# Altium PCB Pcb.PcbDoc
Units mm, origin at the board's own origin, x right, y up, seen from the top; angles counter-clockwise.
Board outline 17 x 18 mm, 2 copper layers (Top Layer, Bottom Layer); 3 components, 4 nets, 11 pads, 4 vias.
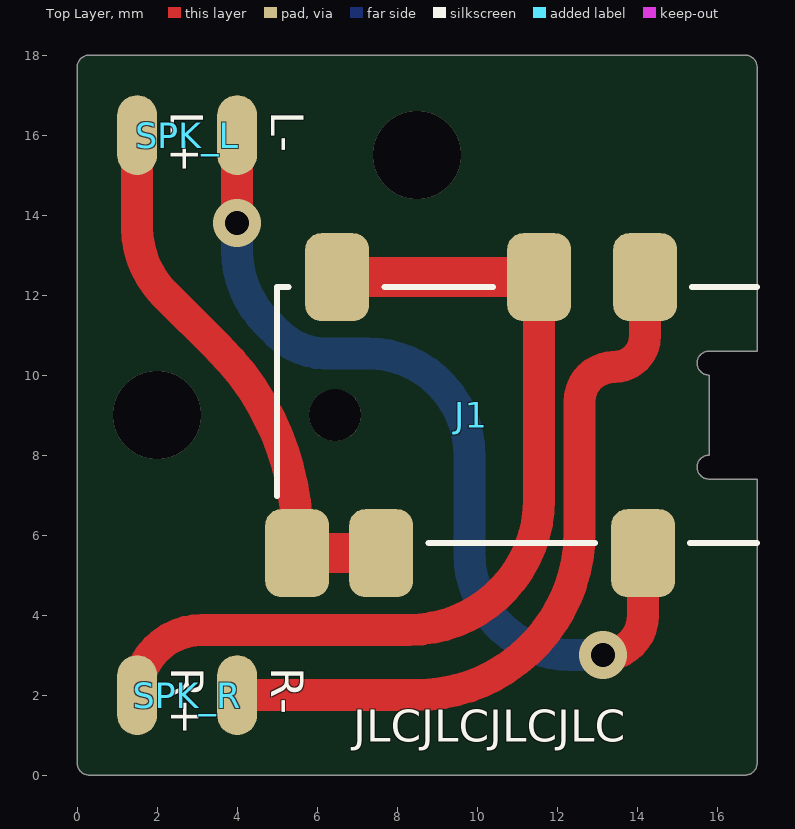
[diagram p0: Top Layer view]
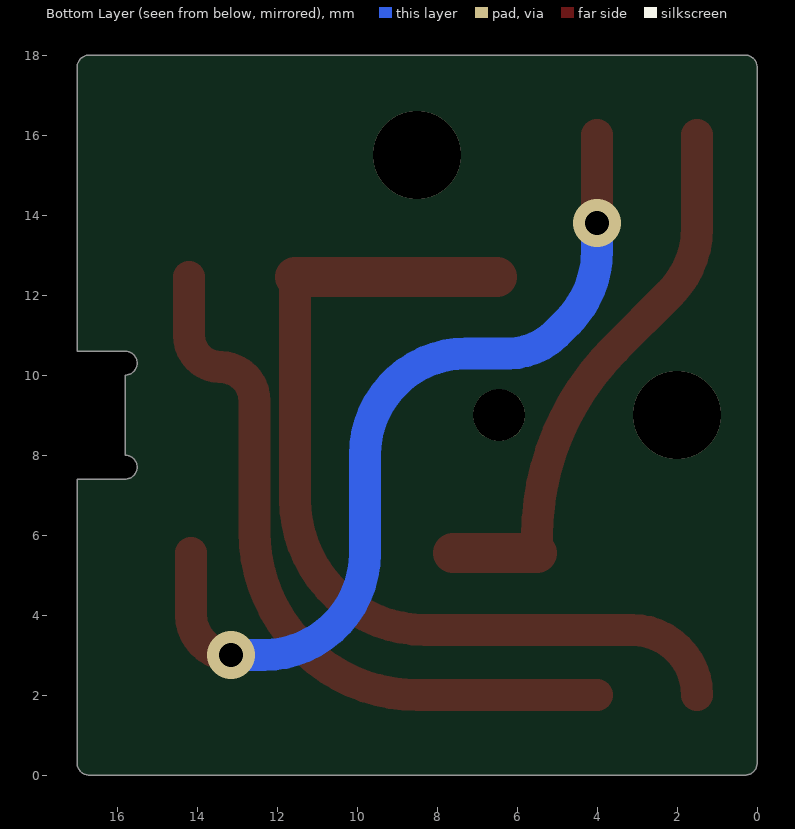
[diagram p1: Bottom Layer view, seen from below]

## Layer stack, top to bottom
Top Solder: solder mask 0.0102, Solder Resist, Dk 3.5
Top Layer: signal copper 0.0356
Dielectric 1: dielectric 0.32, FR-4, Dk 4.8
Bottom Layer: signal copper 0.0356
Bottom Solder: solder mask 0.0102, Solder Resist, Dk 3.5

## Board outline
0.301,0.001 cw(c0.301,0.301) 0.001,0.301 0,0.302 0,17.7 cw(c0.3,17.7) 0.3,18 16.7,18 cw(c16.7,17.7) 17,17.7 17,12.2 17,10.6 15.8,10.6 ccw(c15.8,10.3) 15.8,10 15.8,8 ccw(c15.8,7.7) 15.8,7.4 17,7.4 17,5.8 17,0.301 cw(c16.7,0.301) 16.7,0.001 16.699,0

## Design rules (kind name [scope] priority, off if disabled: settings)
Clearance [All] p1: gap=0.152 ignorepadtopadclearanceinfootprint=FALSE
PolygonConnect [All] p1: connectstyle=Relief reliefconductorwidth=0.254 reliefentries=4 polygonreliefangle="90 Angle" airgapwidth=0.254
RoutingVias [All] p1: holewidth=0.6 width=1.2 viastyle="Through Hole" minholewidth=0.3 minwidth=0.6 maxholewidth=6.35 maxwidth=6.35
SolderMaskExpansion [All] p1: expansion=0.102 istentingtop=FALSE
Width [All] p1: maxlimit=2 minlimit=0.254 preferedwidth=0.254
30 further rules are at their usual default settings.

## Components (designator, comment, footprint, x,y, rotation, side; value= is the part's Value field where it differs from the comment)
J1 "PJ-342" PJ-342 17,5.55 r180 top
SPK_L "Spaker" SPAKER 1.5,16 r0 top
SPK_R "Spaker" SPAKER 1.5,2 r0 top

## Footprints (in the part's own frame and the unit in brackets; to place one, negate y for a bottom-side part, rotate by r counter-clockwise, add the part's x,y. Pads: shape width x height; smd on the part's side, far side on the other; paste and mask are expansions set on the pad)
PJ-342 [mm]
  rrect50% 1.6x2.2 smd: 1(2.8,-6.9) 2(2.85,0) 3(5.45,-6.9) 4(9.4,0) 5(10.5,-6.9) 6(11.5,0)
  round 1.3 hole 1.3: ""(10.55,-3.45)
  silkscreen extent 0,-6.65 12,-0.25
SPAKER [mm]
  oval 1x2 smd: SPK_N(2.5,0) SPK_P(0,0)

## Via types
v1: diameter 1.2, hole 0.6, Top Layer to Bottom Layer, tented both sides, 2 vias
v2: diameter 2.2, hole 2.2, Top Layer to Bottom Layer, 2 vias

## Nets (pads, with @x,y where several pads share a name; then routed paths per layer and width w, separated by ;. In a path a pad name is that pad's centre, name@x,y a point inside that pad or via, vN(x,y) a via of type N, cw(c..) or ccw(c..) an arc to the next point about the centre after c; other vN are vias at no path point)
SPK_L+: J1.4 J1.6 SPK_L.SPK_P | length 13.8
  Top Layer w0.8: SPK_L.SPK_P 1.5,13.8 1.5,13.687 ccw(c3.847,13.687) 2.187,12.028 3.558,10.657 cw(c-1.132,5.968) 5.5,5.968 5.5,5.965 J1.6
  Top Layer w1: J1.6 J1.4
SPK_L-: J1.2 SPK_L.SPK_N | length 22
  Top Layer w0.8: v1(4,13.8) SPK_L.SPK_N ; v1(13.15,3) ccw(c13.15,4) 14.15,4 J1.2
  Bottom Layer w0.8: v1(4,13.8) 4,13.112 ccw(c6.54,13.112) 4.744,11.316 5.027,11.033 ccw(c6.205,12.211) 6.205,10.545 7.265,10.545 cw(c7.265,8.005) 9.805,8.005 9.805,5.54 ccw(c12.345,5.54) 12.345,3 v1(13.15,3)
SPK_R+: J1.3 J1.5 SPK_R.SPK_P | length 23.5
  Top Layer w0.8: SPK_R.SPK_P cw(c3.13,2) 3.13,3.63 8.29,3.63 ccw(c8.29,6.89) 11.55,6.89 J1.3
  Top Layer w1: J1.5 J1.3
SPK_R-: J1.1 SPK_R.SPK_N | length 18.2
  Top Layer w0.8: SPK_R.SPK_N 8.48,2 ccw(c8.48,6.085) 12.565,6.085 12.565,9.35 cw(c13.415,9.35) 13.415,10.2 ccw(c13.415,10.985) 14.2,10.985 J1.1
pads on no net: J1.
copper on no net:
  other v2: 2,9 8.5,15.5

## Silkscreen, mask and mechanical layers (free items; w line width, h text height)
Top Overlay:
  text "L+" at 2.337,16.598 h0.81 r270
  text "L-" at 4.852,16.598 h0.81 r270
  text "R+" at 2.347,2.698 h0.81 r270
  text "R-" at 4.852,2.698 h0.81 r270
  text "JLCJLCJLCJLC" at 6.907,0.837 h0.8
Mechanical 1:
  lines w0.152: 0,0.302 0,17.7 cw(c0.3,17.7) 0.3,18 16.7,18 cw(c16.7,17.7) 17,17.7 17,12.2 ; 0.001,0.301 ccw(c0.301,0.301) 0.301,0.001 ; 0.302,0 16.699,0 ; 16.7,0.001 ccw(c16.7,0.301) 17,0.301 17,5.8